# EAGLE board ctecka_mala (EAGLE 4.16)
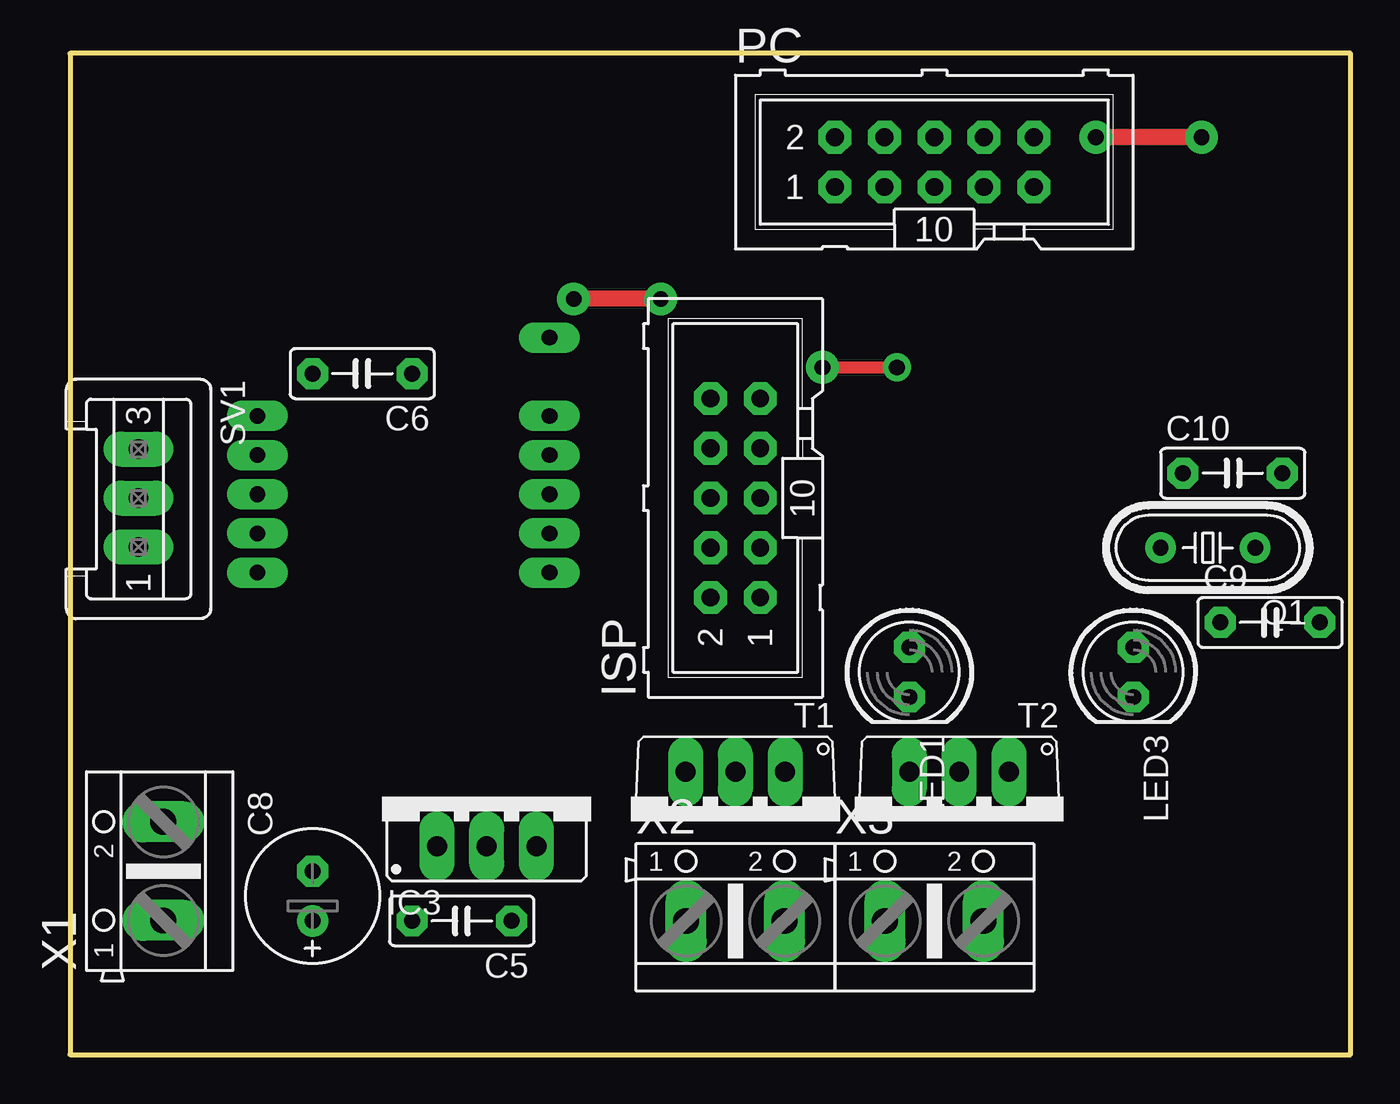
[diagram p0: board, top side]
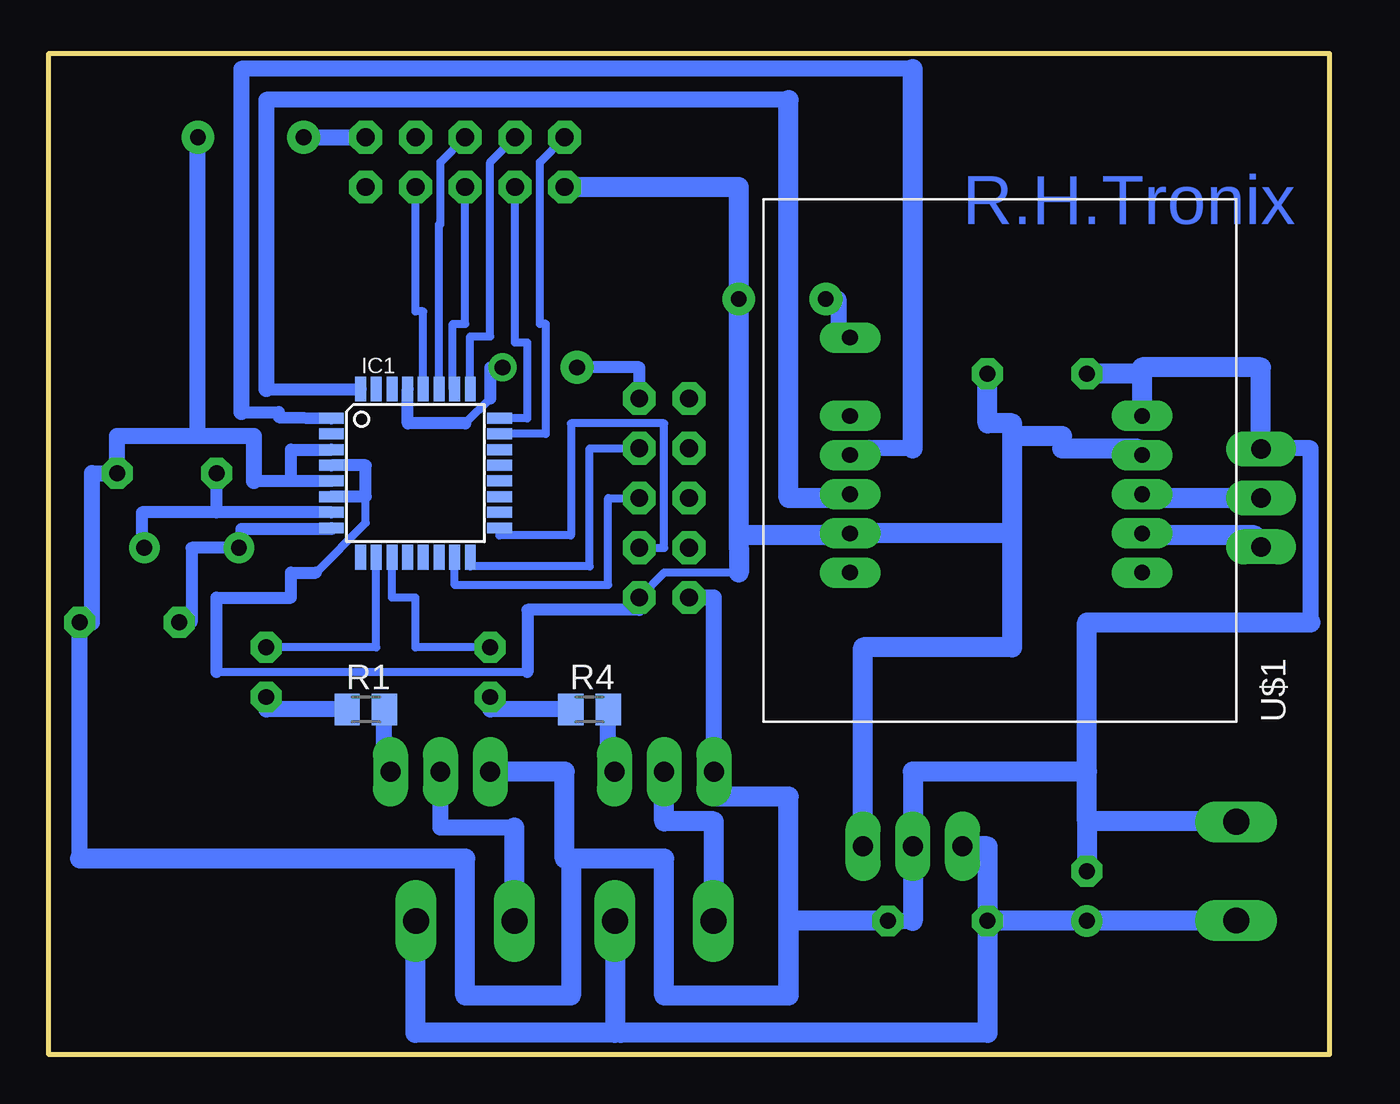
[diagram p1: board, bottom side, seen from below]

Size 65.38 x 51.11 mm. Coordinates in mm from the lower left corner, seen from the top.
Outline: 0,0 65.38,0 65.38,51.11 0,51.11 0,0
Copper layers (1*16): Top 0.035mm / dielectric 1.5mm / Bottom 0.035mm
Design rules "default": minimum track width 10mil, minimum drill 24mil, track to track 8mil, track to pad 8mil, pad to pad 8mil, via to via 8mil, smd to smd 8mil, copper to edge 40mil, drill to drill 8mil, minimum pad ring 15mil, minimum via ring 8mil, stop-mask expansion 4mil, vias tented up to drill 0mil, thermal gap 10mil

## Footprints (pad centres in the part's own frame; a part is rotated, then mirrored left to right if it is on the bottom)
C050-025X075 = drill 0.813 octagon: 1 -2.54,0; 2 2.54,0
E2,5-7 = drill 0.813 pad 1.6 round: + -1.27,0 | drill 0.813 pad 1.6 octagon: - 1.27,0
TQFP32-08 = smd 1.27 x 0.559: 1 -4.293,2.8; 2 -4.293,2; 3 -4.293,1.2; 4 -4.293,0.4; 5 -4.293,-0.4; 6 -4.293,-1.2; 7 -4.293,-2; 8 -4.293,-2.8; 17 4.293,-2.8; 18 4.293,-2; 19 4.293,-1.2; 20 4.293,-0.4; 21 4.293,0.4; 22 4.293,1.2; 23 4.293,2; 24 4.293,2.8 | smd 0.559 x 1.27: 9 -2.8,-4.293; 10 -2,-4.293; 11 -1.2,-4.293; 12 -0.4,-4.293; 13 0.4,-4.293; 14 1.2,-4.293; 15 2,-4.293; 16 2.8,-4.293; 25 2.8,4.293; 26 2,4.293; 27 1.2,4.293; 28 0.4,4.293; 29 -0.4,4.293; 30 -1.2,4.293; 31 -2,4.293; 32 -2.8,4.293
78XXS = drill 1.016 long: GND 0,-2.54; IN -2.54,-2.54; OUT 2.54,-2.54
ML10 = drill 0.914 octagon: 1 -5.08,-1.27; 2 -5.08,1.27; 3 -2.54,-1.27; 4 -2.54,1.27; 5 0,-1.27; 6 0,1.27; 7 2.54,-1.27; 8 2.54,1.27; 9 5.08,-1.27; 10 5.08,1.27
LED5MM = drill 0.813 octagon: A -1.27,0; K 1.27,0
HC49/S = drill 0.813 round: 1 -2.413,0; 2 2.413,0
M0805 = smd 1.3 x 1.6: 1 -0.95,0; 2 0.95,0
S03P = drill 1.016 long: 1 2.5,0; 2 0,0; 3 -2.5,0
TO220V = drill 1.016 long: 1 -2.54,-2.54; 2 0,-2.54; 3 2.54,-2.54
H = drill 0.8 long: P$1 10.54,-11.7; P$2 8.54,-11.7; P$3 6.54,-11.7; P$4 4.54,-11.7; P$5 2.54,-11.7; P$6 2.54,3.21; P$7 4.54,3.21; P$8 6.54,3.21; P$9 8.54,3.21; P$10 10.54,3.21; P$11 14.54,3.21
AK500/2 = drill 1.321 long: 1 -2.515,0; 2 2.515,0

## Placement (x,y rotation side)
C5  [C050-025X075]  20,6.82 180 top
C6  [C050-025X075]  14.92,34.76 180 top
C8  [E2,5-7]  12.38,8.09 90 top
C9  [C050-025X075]  61.27,22.06 0 top
C10  [C050-025X075]  59.37,29.68 0 top
IC1  MEGA8-AI  [TQFP32-08]  46.67,29.68 0 bottom
IC3  [78XXS]  21.27,13.17 0 top
ISP  [ML10]  33.97,28.41 90 top
LED1  [LED5MM]  42.86,19.52 270 top
LED3  [LED5MM]  54.29,19.52 270 top
PC  [ML10]  44.13,45.55 0 top
Q1  [HC49/S]  58.1,25.87 180 top
R1  [M0805]  49.21,17.61 0 bottom
R4  [M0805]  37.78,17.61 0 bottom
SV1  [S03P]  3.49,28.41 270 top
T1  [TO220V]  33.97,11.9 180 top
T2  [TO220V]  45.4,11.9 180 top
U$1  RFID_CTECKA  [H]  21.27,22.06 90 bottom
X1  [AK500/2]  4.76,9.36 90 top
X2  [AK500/2]  33.97,6.82 0 top
X3  [AK500/2]  44.13,6.82 0 top

## Library data of the parts
C5 C6 C8-C10 R1 R4 = rcl
IC1 = atmel
IC3 = v-reg
ISP PC = con-harting-ml
LED1 LED3 = led
Q1 = crystal
SV1 = con-amp-mt
T1 T2 = transistor
U$1 = moje
X1-X3 = con-ptr500

## Nets
+5V: C6.1 IC1.4 IC1.6 IC3.OUT ISP.1 PC.1 U$1.P$2 U$1.P$7 U$1.P$11
GND: C5.1 C6.2 C8.- C9.2 C10.2 IC1.3 IC1.5 IC3.GND ISP.2 PC.10 SV1.3 T1.3 T2.3 U$1.P$1 X1.2
N$1: C9.1 IC1.8 Q1.2
N$2: C10.1 IC1.7 Q1.1
N$3: IC1.23 PC.2
N$13: IC1.24 PC.3
N$14: IC1.25 PC.4
N$15: IC1.26 PC.5
N$16: IC1.27 PC.6
N$18: IC1.28 PC.7
N$19: IC1.17 ISP.3
N$20: IC1.15 ISP.5
N$21: IC1.16 ISP.7
N$22: IC1.29 ISP.9
N$26: T1.2 X2.1
N$27: T2.2 X3.1
N$28: R4.2 T1.1
N$29: R1.2 T2.1
N$30: LED1.K R4.1
N$31: LED3.K R1.1
N$32: IC1.10 LED3.A
N$33: IC1.11 LED1.A
N$34: C5.2 C8.+ IC3.IN X1.1 X2.2 X3.2
N$36: IC1.1 U$1.P$9
N$37: SV1.2 U$1.P$3
N$38: IC1.32 U$1.P$8
N$39: SV1.1 U$1.P$4

## Tracks (layer width: path | path; a pad name or v marks a point on that pad's centre or on a via)
+5V  (via drill 0.8 pad 1.68)
  Top 0.813: v30.16,38.57 v25.71,38.57
  Bottom 0.406: ISP.1 33.97,24.6 30.16,24.6 | 49.21,28.48 49.21,27.14 51.75,24.6 | 40.95,19.52 56.83,19.52
  Bottom 0.61: IC1.6 49.21,28.48 49.21,30.08 IC1.4 | 13.65,31.58 13.65,30.95 | 9.84,30.6 9.84,30.32 | 9.84,30.6 U$1.P$2 | 9.84,30.95 9.84,30.6 | 16.19,30.95 16.19,31.58 | 16.19,27.14 16.19,26.6 | 51.75,24.6 53.02,24.6 53.02,23.33 56.83,23.33 56.83,19.52 | 40.95,19.52 40.95,22.7 35.24,22.7 ISP.1
  Bottom 0.813: 24.44,26.5 24.48,26.5 U$1.P$7 | 30.16,26.5 30.16,25.87 | U$1.P$11 25.08,36.6 25.08,38.57 v25.71,38.57 | 30.16,44.28 v30.16,38.57
  Bottom 1.016: 13.65,30.95 9.84,30.95 | 16.19,26.6 U$1.P$7 | 16.19,31.58 13.65,31.58 | 30.16,24.6 30.16,25.87 30.16,44.28 PC.1 | 24.48,26.5 30.16,26.5 | IC3.OUT 23.81,20.79 16.19,20.79 16.19,27.14 16.19,30.95 16.19,32.22 17.46,32.22 C6.1
GND  (via drill 0.8 pad 1.68)
  Top 0.813: v57.78,46.83 v52.38,46.83
  Bottom 0.61: 53.02,29.28 IC1.5 54.92,29.28 53.02,29.28 | IC1.3 53.02,30.88 53.02,29.28
  Bottom 0.813: C5.1 21.27,6.82 | X1.2 4.76,11.9 | ISP.2 31.43,23.33 T1.3 31.43,13.17 | 38.73,10 39.05,10 | 57.78,31.58 61.91,31.58 C10.2 63.18,29.68 63.18,22.06 C9.2 63.81,10 | 9.57,35.08 9.57,34.76 | v52.38,46.83 PC.10 | 57.78,31.58 v57.78,46.83 | 54.92,29.28 54.92,31.58 57.78,31.58 | SV1.3 3.49,30.95 0.95,30.95 0.95,22.06
  Bottom 1.016: 12.38,11.9 C8.- | 21.27,6.82 IC3.GND 21.27,14.44 12.38,14.44 | 4.76,11.9 12.38,11.9 | 12.38,11.9 12.38,14.44 | T2.3 39.05,14.44 39.05,10 | 27.62,3.01 33.97,3.01 33.97,10 38.73,10 38.73,3.01 44.13,3.01 44.13,10 63.81,10 | 27.62,3.01 27.62,13.17 31.43,13.17 | U$1.P$1 9.57,34.76 C6.2 | 3.49,30.95 3.49,35.08 9.57,35.08 | 12.38,14.44 12.38,22.06 0.95,22.06 | 27.62,3.01 27.62,6.82 C5.1
N$1
  Bottom 0.61: IC1.8 50.96,26.82 55.56,26.82 55.56,25.87 | Q1.2 58.1,25.87 58.1,22.06 C9.1
  Bottom 0.813: 55.56,25.87 Q1.2
N$2
  Bottom 0.61: Q1.1 60.64,25.87 60.64,27.68 56.83,27.68 | IC1.7 56.83,27.68 | 56.83,27.68 C10.1
N$3
  Bottom 0.406: IC1.23 40,31.68 40,37.3 40.32,37.3 40.32,45.55 PC.2
N$13
  Bottom 0.406: IC1.24 40.95,32.48 40.95,36.35 41.59,36.35 PC.3
N$14
  Bottom 0.406: IC1.25 43.87,36.67 42.86,36.67 42.86,45.55 PC.4
N$15
  Bottom 0.406: IC1.26 44.76,33.97 44.76,37.3 44.13,37.3 PC.5
N$16
  Bottom 0.406: IC1.27 45.47,42.38 45.4,42.38 45.4,45.55 PC.6
N$18
  Bottom 0.406: IC1.28 46.27,37.94 46.67,37.94 PC.7
N$19
  Bottom 0.406: IC1.17 42.37,26.5 38.73,26.5 38.73,32.22 33.97,32.22 33.97,25.87 ISP.3
N$20
  Bottom 0.406: IC1.15 44.67,23.96 36.82,23.96 36.82,28.41 ISP.5
N$21
  Bottom 0.406: IC1.16 43.87,24.92 37.78,24.92 37.78,30.95 ISP.7
N$22  (via drill 0.8 pad 1.42, 0.8 pad 1.68)
  Top 0.61: v38.41,35.08 v42.22,35.08
  Bottom 0.406: 42.86,33.49 44.13,32.22
  Bottom 0.61: IC1.29 47.07,32.22 44.13,32.22 | 42.86,33.49 42.86,35.08 v42.22,35.08 | v38.41,35.08 35.24,35.08 ISP.9 35.24,33.17
N$26
  Bottom 0.813: X2.1 31.43,6.82
  Bottom 1.016: 31.43,6.82 31.43,11.9 33.97,11.9 T1.2
N$27
  Bottom 0.813: 41.61,11.58 45.4,11.58 T2.2
  Bottom 1.016: X3.1 41.61,11.58
N$28
  Bottom 0.813: R4.2 36.83,14.44 T1.1
N$29
  Bottom 0.813: R1.2 48.26,14.44 T2.1
N$30
  Bottom 0.813: R4.1 42.86,17.61 LED1.K
N$31
  Bottom 0.813: R1.1 54.29,17.61 LED3.K
N$32
  Bottom 0.406: IC1.10 48.67,20.79 LED3.A
N$33
  Bottom 0.406: IC1.11 47.87,23.33 46.67,23.33 46.67,20.79 LED1.A
N$34
  Bottom 0.813: X1.1 4.76,6.82 | 17.46,10.63 C5.2 | 46.67,6.82 X3.2 | 36.48,1.11 36.19,1.11
  Bottom 1.016: 4.76,6.82 C8.+ C5.2 | 46.67,6.82 46.67,1.11 36.19,1.11 17.46,1.11 17.46,10.63 IC3.IN | X2.2 36.48,1.11
N$36
  Bottom 0.61: 55.56,32.8 53.65,32.8 53.65,32.54 IC1.1 | 24.44,30.6 24.44,30.32 | 24.44,30.6 U$1.P$9 | 24.44,30.95 24.44,30.6
  Bottom 0.813: 55.56,32.8 55.56,50.32 21.27,50.32 | 21.27,30.95 24.44,30.95
  Bottom 1.016: 21.27,30.95 21.27,50.32
N$37
  Bottom 0.813: 9.57,28.41 U$1.P$3
  Bottom 1.016: SV1.2 9.57,28.41
N$38
  Bottom 0.61: 54.29,33.97 IC1.32 | 24.44,28.41 24.44,28.6 U$1.P$8
  Bottom 0.813: 54.29,33.97 54.29,48.73 27.62,48.73
  Bottom 1.016: 27.62,48.73 27.62,28.41 24.44,28.41
N$39
  Bottom 0.813: 9.57,26.5 U$1.P$4 | SV1.1 3.49,25.87 | 3.8,25.87 3.8,26.5
  Bottom 1.016: 3.8,26.5 9.57,26.5 | 3.49,25.87 3.8,25.87

## Text on the board
Bottom: R.H.Tronix